# Altium PCB zigbee_board.PCBDOC (part 2 of 2)
Units mil, origin at the board's own origin, x right, y up, seen from the top; angles counter-clockwise.
Board outline 1555 x 795 mil, 2 copper layers (TOP, BOTTOM), stack 10.4 mil thick; 37 components, 38 nets, 180 pads, 75 vias.
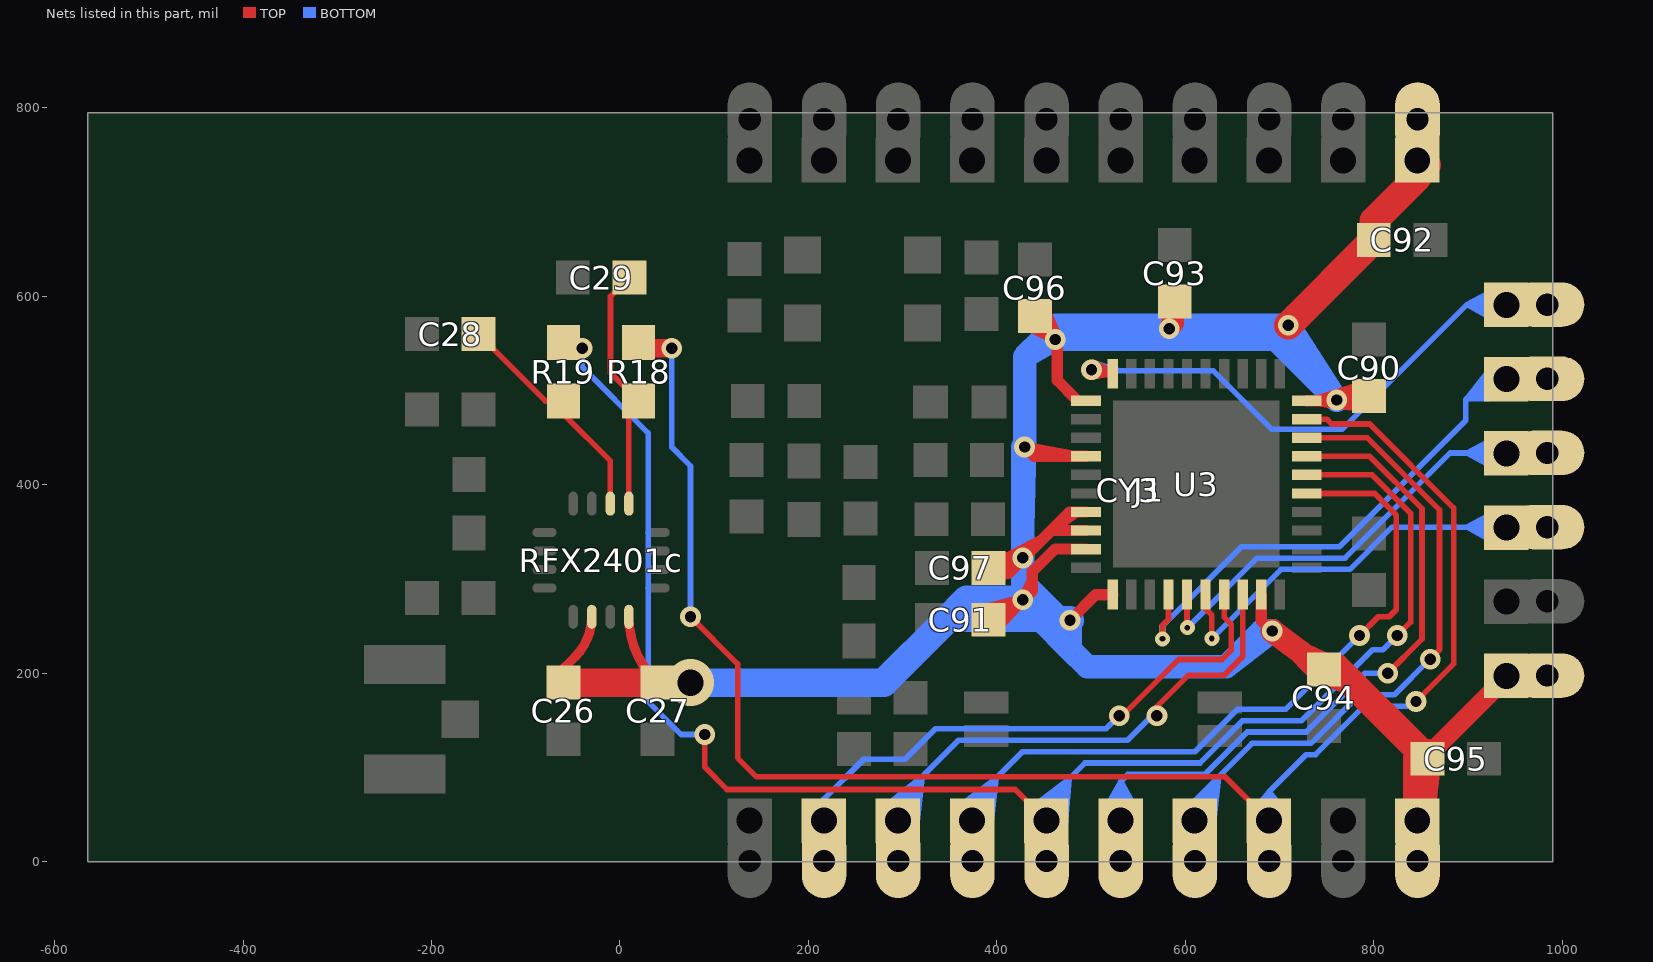
[diagram p2: the nets of this part, all layers, seen from the top]

## Via types
v1: diameter 22, hole 12, TOP to BOTTOM, 67 vias
v2: diameter 25.98, hole 12.99, TOP to BOTTOM, tented top, 4 vias
v3: diameter 16, hole 6, TOP to BOTTOM, 3 vias
v4: diameter 50, hole 28, TOP to BOTTOM, 1 vias

## Nets (pads, with @x,y where several pads share a name; then routed paths per layer and width w, separated by ;. In a path a pad name is that pad's centre, name@x,y a point inside that pad or via, vN(x,y) a via of type N, cw(c..) or ccw(c..) an arc to the next point about the centre after c; other vN are vias at no path point) (continued)
P11: CY3.7 J1.7 R18.1 U3.9 | length 2563.8
  TOP w6: R18.1@20,551 R18.1@26,545 ; v1(75,260) 125,210 125,110 145,90 642.53,90 CY3.7@688.87,43.66 ; U3.9@728.91,469.59 750.41,469.59 755.48,464.52 795.85,464.52 885,375.38 885,210 v1(845,170)
  TOP w20: R18.1@26,545 v1(55,545)
  BOTTOM w6: v1(55,545) 55,440 75,420 v1(75,260) ; CY3.7@668.93,38.42 J1.7@689.13,2.03 ; CY3.7@669.15,21.59 CY3.7@689.13,58.1 ; CY3.7@669.52,50.77 689.13,74.25 ; CY3.7@674.49,41 J1.7@689.13,2.03 ; CY3.7@674.71,47.27 689.13,74.25 ; J1.7@674.74,19.05 CY3.7@689.13,58.1 ; CY3.7@680.3,42.71 J1.7@689.13,2.03 ; CY3.7@680.35,44.94 689.13,74.25 ; J1.7@680.56,17.37 CY3.7@689.13,58.1 ; J1.7@689.13,0.73 689.13,43.66 689.13,74.25 ; J1.7@689.13,16.48 CY3.7@689.13,58.1 ; CY3.7@697.45,42.82 J1.7@689.13,2.03 ; CY3.7@697.42,44.8 689.13,74.25 ; J1.7@697.71,17.37 CY3.7@689.13,58.1 ; CY3.7@703.1,47.03 689.13,74.25 ; CY3.7@703.28,41.18 J1.7@689.13,2.03 ; J1.7@703.53,19.05 CY3.7@689.13,58.1 ; CY3.7@708.35,50.44 689.13,74.25 ; CY3.7@708.88,38.67 J1.7@689.13,2.03 ; CY3.7@709.11,21.59 CY3.7@689.13,58.1 ; 835.07,165.07 789.89,165.07 738.45,113.62 728.51,113.62 689.13,74.25 ; J1.7@689.13,2.03 CY3.7@688.87,43.66 689.13,74.25
P12: CY3.6 J1.6 U3.8 | length 1634.8
  TOP w6: U3.8@728.91,449.9 793.41,449.9 870,373.31 870,225 v1(860,215) ; U3.8@739.15,449.9 762.66,449.9
  BOTTOM w6: CY3.6@590.19,38.42 J1.6@610.39,2.03 ; CY3.6@590.41,21.59 CY3.6@610.39,58.1 ; CY3.6@595.75,41 J1.6@610.39,2.03 ; J1.6@596,19.05 CY3.6@610.39,58.1 ; CY3.6@598.39,52.36 635.44,90.08 ; CY3.6@601.56,42.71 J1.6@610.39,2.03 ; J1.6@601.82,17.37 CY3.6@610.39,58.1 ; CY3.6@602.92,48.39 635.44,90.08 ; J1.6@610.39,0.73 610.39,43.66 610.39,65.03 670.98,125.62 733.38,125.62 784.94,177.17 822.17,177.17 v1(860,215) ; J1.6@610.39,16.48 CY3.6@610.39,58.1 ; CY3.6@618.01,40.16 635.44,90.08 ; CY3.6@618.71,42.82 J1.6@610.39,2.03 ; J1.6@618.97,17.37 CY3.6@610.39,58.1 ; CY3.6@623.82,38.5 635.44,90.08 ; CY3.6@624.54,41.18 J1.6@610.39,2.03 ; J1.6@624.79,19.05 CY3.6@610.39,58.1 ; CY3.6@629.82,37.51 635.44,90.08 ; CY3.6@630.14,38.67 J1.6@610.39,2.03 ; CY3.6@630.37,21.59 CY3.6@610.39,58.1 ; J1.6@610.39,2.03 CY3.6@610.13,43.66 635.44,90.08
P13: CY3.5 J1.5 U3.7 | length 1648.5
  TOP w6: U3.7@728.91,430.22 795.87,430.22 851.31,374.78 851.31,246.31 ; U3.7@739.15,430.22 762.66,430.22 ; v1(815,200) 851.31,236.31 851.31,246.31 ; 850.98,245.98 851.31,246.31
  BOTTOM w6: CY3.5@511.45,38.42 J1.5@531.65,2.03 ; CY3.5@511.45,48.89 531.65,85.26 ; CY3.5@511.67,21.59 CY3.5@531.65,58.1 ; CY3.5@517.01,41 J1.5@531.65,2.03 ; CY3.5@517.01,46.32 531.65,85.26 ; J1.5@517.26,19.05 CY3.5@531.65,58.1 ; CY3.5@522.82,42.71 J1.5@531.65,2.03 ; CY3.5@522.82,44.6 531.65,85.26 ; J1.5@523.08,17.37 CY3.5@531.65,58.1 ; J1.5@531.65,0.73 531.65,43.66 531.65,85.26 ; J1.5@531.65,16.48 CY3.5@531.65,58.1 ; CY3.5@539.97,42.82 J1.5@531.65,2.03 ; CY3.5@539.97,44.5 531.65,85.26 ; J1.5@540.23,17.37 CY3.5@531.65,58.1 ; CY3.5@545.8,41.18 J1.5@531.65,2.03 ; CY3.5@545.8,46.13 531.65,85.26 ; J1.5@546.05,19.05 CY3.5@531.65,58.1 ; CY3.5@551.4,38.67 J1.5@531.65,2.03 ; CY3.5@551.4,48.64 531.65,85.26 ; CY3.5@551.63,21.59 CY3.5@531.65,58.1 ; v1(815,200) 790.78,200 728.4,137.62 665.83,137.62 620.86,92.66 539.05,92.66 531.65,85.26 ; J1.5@531.65,2.03 CY3.5@531.39,43.66 531.65,85.26
P14_CSN: CY3.4 J1.4 R19.1 U3.6 | length 2639.3
  TOP w6: R19.1@-60,551 R19.1@-54,545 ; v1(90,135) 90,100.34 113.68,76.66 419.65,76.66 CY3.4@452.65,43.66 ; U3.6@728.91,410.53 798.57,410.53 839.31,369.79 839.31,254.31 v1(825,240) ; U3.6@739.15,410.53 762.66,410.53
  BOTTOM w6: v1(-40,545) -40,525 30,455 30,170 65,135 v1(90,135) ; CY3.4@432.71,38.42 J1.4@452.91,2.03 ; CY3.4@432.93,21.59 CY3.4@452.91,58.1 ; CY3.4@436.95,57.02 476.88,88.04 ; CY3.4@438.27,41 J1.4@452.91,2.03 ; J1.4@438.52,19.05 CY3.4@452.91,58.1 ; CY3.4@440.97,52.44 476.88,88.04 ; CY3.4@444.08,42.71 J1.4@452.91,2.03 ; J1.4@444.34,17.37 CY3.4@452.91,58.1 ; CY3.4@445.46,48.42 476.88,88.04 ; J1.4@452.91,0.73 452.91,43.66 452.91,64.08 493.56,104.73 615.84,104.73 660.73,149.62 723.43,149.62 798.81,225 810,225 v1(825,240) ; J1.4@452.91,16.48 CY3.4@452.91,58.1 ; CY3.4@460.55,40.19 476.88,88.04 ; CY3.4@461.23,42.82 J1.4@452.91,2.03 ; J1.4@461.49,17.37 CY3.4@452.91,58.1 ; CY3.4@466.37,38.58 476.88,88.04 ; CY3.4@467.06,41.18 J1.4@452.91,2.03 ; J1.4@467.31,19.05 CY3.4@452.91,58.1 ; CY3.4@472.39,37.68 476.88,88.04 ; CY3.4@472.66,38.67 J1.4@452.91,2.03 ; CY3.4@472.89,21.59 CY3.4@452.91,58.1 ; J1.4@452.91,2.03 CY3.4@452.65,43.66 476.88,88.04
P15_SCK: CY3.3 J1.3 U3.5 | length 1770
  TOP w6: U3.5@728.91,390.85 801.28,390.85 824.1,368.03 824.1,267.45 816.66,260 805,260 v1(785,240) ; U3.5@739.15,390.85 762.66,390.85
  BOTTOM w6: CY3.3@353.97,38.42 J1.3@374.17,2.03 ; CY3.3@354.19,21.59 CY3.3@374.17,58.1 ; CY3.3@358.31,57.14 399.18,88.66 ; CY3.3@359.53,41 J1.3@374.17,2.03 ; J1.3@359.78,19.05 CY3.3@374.17,58.1 ; CY3.3@362.31,52.55 399.18,88.66 ; CY3.3@365.34,42.71 J1.3@374.17,2.03 ; J1.3@365.6,17.37 CY3.3@374.17,58.1 ; CY3.3@366.77,48.49 399.18,88.66 ; J1.3@374.17,0.73 374.17,43.66 374.17,63.65 427.27,116.75 610.41,116.75 655.28,161.62 706.62,161.62 v1(785,240) ; J1.3@374.17,16.48 CY3.3@374.17,58.1 ; CY3.3@381.76,40.08 399.18,88.66 ; CY3.3@382.49,42.82 J1.3@374.17,2.03 ; J1.3@382.75,17.37 CY3.3@374.17,58.1 ; CY3.3@387.55,38.38 399.18,88.66 ; CY3.3@388.32,41.18 J1.3@374.17,2.03 ; J1.3@388.57,19.05 CY3.3@374.17,58.1 ; CY3.3@393.55,37.36 399.18,88.66 ; CY3.3@393.92,38.67 J1.3@374.17,2.03 ; CY3.3@394.15,21.59 CY3.3@374.17,58.1 ; J1.3@374.17,2.03 CY3.3@373.91,43.66 399.18,88.66
P16_MOSI: CY3.2 J1.2 U3.38 | length 1538.8
  TOP w6: v1@564.33,158.82 603.53,198.02 641.52,198.02 661,217.5 U3.38@661,283.56 ; 661,249.82 U3.38@661,273.33
  BOTTOM w6: CY3.2@275.23,38.42 J1.2@295.43,2.03 ; CY3.2@275.45,21.59 CY3.2@295.43,58.1 ; CY3.2@279.38,56.91 320.7,90.1 ; CY3.2@280.79,41 J1.2@295.43,2.03 ; J1.2@281.04,19.05 CY3.2@295.43,58.1 ; CY3.2@283.45,52.4 320.7,90.1 ; CY3.2@286.6,42.71 J1.2@295.43,2.03 ; J1.2@286.86,17.37 CY3.2@295.43,58.1 ; CY3.2@287.98,48.41 320.7,90.1 ; J1.2@295.43,0.73 295.43,43.66 295.43,64.84 359.44,128.84 538.84,128.84 v1@567.5,157.5 ; J1.2@295.43,16.48 CY3.2@295.43,58.1 ; CY3.2@303.04,40.13 320.7,90.1 ; CY3.2@303.75,42.82 J1.2@295.43,2.03 ; J1.2@304.01,17.37 CY3.2@295.43,58.1 ; CY3.2@308.84,38.45 320.7,90.1 ; CY3.2@309.58,41.18 J1.2@295.43,2.03 ; J1.2@309.83,19.05 CY3.2@295.43,58.1 ; CY3.2@314.83,37.43 320.7,90.1 ; CY3.2@315.18,38.67 J1.2@295.43,2.03 ; CY3.2@315.41,21.59 CY3.2@295.43,58.1 ; J1.2@295.43,2.03 CY3.2@295.17,43.66 320.7,90.1
  other v1: 570,155
P17_MISO: CY3.1 J1.1 U3.37 | length 1220.3
  TOP w6: v1(530,155) 538.24,159.82 593.09,214.66 639.15,214.66 649,224.51 649,251.9 641.32,259.58 ; U3.37@641.32,273.33 641.32,259.58 ; U3.37@641.32,283.56 641.32,259.58
  BOTTOM w6: CY3.1@196.49,38.42 J1.1@216.69,2.03 ; CY3.1@196.71,21.59 CY3.1@216.69,58.1 ; CY3.1@202.05,41 J1.1@216.69,2.03 ; J1.1@202.3,19.05 CY3.1@216.69,58.1 ; CY3.1@207.86,42.71 J1.1@216.69,2.03 ; J1.1@208.12,17.37 CY3.1@216.69,58.1 ; CY3.1@216.43,43.66 J1.1@216.69,2.03 ; J1.1@216.69,0.73 CY3.1@216.69,43.66 ; J1.1@216.69,16.48 CY3.1@216.69,58.1 ; CY3.1@216.69,45 216.69,66.69 258.77,108.77 302.64,108.77 335,141.14 516.14,141.14 v1(530,155) ; CY3.1@225.01,42.82 J1.1@216.69,2.03 ; J1.1@225.27,17.37 CY3.1@216.69,58.1 ; CY3.1@230.84,41.18 J1.1@216.69,2.03 ; J1.1@231.09,19.05 CY3.1@216.69,58.1 ; CY3.1@236.44,38.67 J1.1@216.69,2.03 ; CY3.1@236.67,21.59 CY3.1@216.69,58.1
P20: CY3.12 J1.12 U3.36 | length 1513
  TOP w6: U3.36@620,270 628.37,261.63 v3(628.37,236.84) ; U3.36@621.63,283.56 U3.36@624.14,283.56
  BOTTOM w6: v3(628.37,236.84) 701.77,310.24 774.8,310.24 819.62,355.06 940.84,355.06 J1.12@984.41,355.06 ; CY3.12@935.55,334.75 899.22,355.06 ; CY3.12@935.92,374.7 899.22,355.06 ; CY3.12@938.14,340.31 899.22,355.06 ; CY3.12@938.41,369.1 899.22,355.06 ; CY3.12@939.87,346.11 899.22,355.06 ; CY3.12@940.03,363.26 899.22,355.06 ; CY3.12@941.66,363.26 J1.12@982.46,355.06 ; CY3.12@941.81,346.11 J1.12@982.46,355.06 ; CY3.12@942.06,363.21 J1.12@968.66,355.06 ; CY3.12@942.29,346.18 J1.12@968.66,355.06 ; CY3.12@943.28,369.1 J1.12@982.46,355.06 ; CY3.12@943.54,340.31 J1.12@982.46,355.06 ; CY3.12@944.49,368.84 J1.12@968.66,355.06 ; CY3.12@944.88,340.63 J1.12@968.66,355.06 ; CY3.12@945.77,374.7 J1.12@982.46,355.06 ; CY3.12@946.13,334.75 J1.12@982.46,355.06 ; CY3.12@948.22,373.94 J1.12@968.66,355.06 ; CY3.12@948.75,335.63 J1.12@968.66,355.06 ; CY3.12@963.55,335.08 CY3.12@927.04,355.06 ; CY3.12@963.55,375.04 CY3.12@927.04,355.06 ; J1.12@966.09,340.67 CY3.12@927.04,355.06 ; J1.12@966.09,369.46 CY3.12@927.04,355.06 ; J1.12@967.77,346.49 CY3.12@927.04,355.06 ; J1.12@967.77,363.64 CY3.12@927.04,355.06 ; 899.22,355.06 CY3.12@940.84,354.68 ; CY3.12@927.04,355.06 J1.12@968.66,355.06 ; CY3.12@940.84,354.68 J1.12@982.46,355.06 ; CY3.12@940.84,354.68 J1.12@968.66,355.06
P21: CY3.13 J1.13 U3.35 | length 1640.9
  TOP w6: v3@601.95,249.82 601.95,273.33 v3(602.35,248.35) ; U3.35@601.95,277.35 v3(602.35,248.35) ; U3.35@601.95,283.56 601.95,248.35 v3(602.35,248.35)
  BOTTOM w6: v3(602.35,248.35) 676.25,322.24 769.74,322.24 881.3,433.8 940.84,433.8 J1.13@984.41,433.8 ; CY3.13@935.55,413.49 899.22,433.8 ; CY3.13@935.92,453.44 899.22,433.8 ; CY3.13@938.14,419.05 899.22,433.8 ; CY3.13@938.41,447.84 899.22,433.8 ; CY3.13@939.87,424.85 899.22,433.8 ; CY3.13@940.03,442 899.22,433.8 ; CY3.13@941.66,442 J1.13@982.46,433.8 ; CY3.13@941.81,424.85 J1.13@982.46,433.8 ; CY3.13@942.06,441.95 J1.13@968.66,433.8 ; CY3.13@942.29,424.92 J1.13@968.66,433.8 ; CY3.13@943.28,447.84 J1.13@982.46,433.8 ; CY3.13@943.54,419.05 J1.13@982.46,433.8 ; CY3.13@944.49,447.58 J1.13@968.66,433.8 ; CY3.13@944.88,419.37 J1.13@968.66,433.8 ; CY3.13@945.77,453.44 J1.13@982.46,433.8 ; CY3.13@946.13,413.49 J1.13@982.46,433.8 ; CY3.13@948.22,452.68 J1.13@968.66,433.8 ; CY3.13@948.75,414.37 J1.13@968.66,433.8 ; CY3.13@963.55,413.82 CY3.13@927.04,433.8 ; CY3.13@963.55,453.78 CY3.13@927.04,433.8 ; J1.13@966.09,419.41 CY3.13@927.04,433.8 ; J1.13@966.09,448.2 CY3.13@927.04,433.8 ; J1.13@967.77,425.23 CY3.13@927.04,433.8 ; J1.13@967.77,442.38 CY3.13@927.04,433.8 ; 899.22,433.8 CY3.13@940.84,433.42 ; CY3.13@927.04,433.8 J1.13@968.66,433.8 ; CY3.13@940.84,433.42 J1.13@982.46,433.8 ; CY3.13@940.84,433.42 J1.13@968.66,433.8
P22: CY3.14 J1.14 U3.34 | length 1703.6
  TOP w6: v3(575.99,236.49) 575.99,250.99 582.26,257.26 U3.34@582.26,283.56
  BOTTOM w6: v3(575.99,236.49) 575.99,250.28 659.98,334.27 763.71,334.27 897.87,468.43 897.87,490.36 920.05,512.54 940.84,512.54 J1.14@984.41,512.54 ; CY3.14@927.82,528.15 898.35,490.85 ; CY3.14@932.35,524.07 898.35,490.85 ; CY3.14@936.29,519.48 898.35,490.85 ; CY3.14@941.66,520.74 J1.14@982.46,512.54 ; CY3.14@941.81,503.59 J1.14@982.46,512.54 ; CY3.14@942.06,520.69 J1.14@968.66,512.54 ; CY3.14@942.29,503.66 J1.14@968.66,512.54 ; CY3.14@943.28,526.58 J1.14@982.46,512.54 ; CY3.14@943.54,497.79 J1.14@982.46,512.54 ; CY3.14@943.99,504.13 898.35,490.85 ; CY3.14@944.49,526.32 J1.14@968.66,512.54 ; CY3.14@944.88,498.11 J1.14@968.66,512.54 ; CY3.14@945.31,498.24 898.35,490.85 ; CY3.14@945.77,532.18 J1.14@982.46,512.54 ; CY3.14@945.87,492.16 898.35,490.85 ; CY3.14@946.13,492.23 J1.14@982.46,512.54 ; CY3.14@948.22,531.42 J1.14@968.66,512.54 ; CY3.14@948.75,493.11 J1.14@968.66,512.54 ; CY3.14@963.55,492.56 CY3.14@927.04,512.54 ; CY3.14@963.55,532.52 CY3.14@927.04,512.54 ; J1.14@966.09,498.15 CY3.14@927.04,512.54 ; J1.14@966.09,526.94 CY3.14@927.04,512.54 ; J1.14@967.77,503.97 CY3.14@927.04,512.54 ; J1.14@967.77,521.12 CY3.14@927.04,512.54 ; 898.35,490.85 CY3.14@940.84,512.16 ; CY3.14@927.04,512.54 J1.14@968.66,512.54 ; CY3.14@940.84,512.16 J1.14@982.46,512.54 ; CY3.14@940.84,512.16 J1.14@968.66,512.54
R18_1: C29.1 R18.2 RFX2401c.5 | length 265
  TOP w6: RFX2401c.5@9.53,380.04 9.53,478.53 R18.2@20,489 -10,519 -10,600 C29.1@10,620
R19_1: C28.1 R19.2 RFX2401c.6 | length 249
  TOP w6: C28.1@-150,560 -79,489 R19.2@-60,489 -60,475 -10.16,425.16 RFX2401c.6@-10.16,380.04
RESET: CY3.15 J1.15 U3.20 | length 1908.7
  TOP w6: v1@500.43,514.25 U3.20@523.21,517.82 ; v1@501.53,514.3 U3.20@523.21,520.92 ; v1@502.46,530.03 U3.20@523.21,520.92 ; v1@503.46,529.71 U3.20@523.21,517.82 ; v1@500.58,520.92 v1(500.58,522.25) ; v1@500.58,520.92 U3.20@523.21,520.92 ; v1@500.58,520.92 U3.20@523.21,517.82 ; v1(500.58,522.25) U3.20@523.21,520.92 ; v1(500.58,522.25) U3.20@523.21,517.82 ; U3.20@523.21,517.82 U3.20@523.21,520.92
  BOTTOM w6: v1@501.32,514.28 529.65,520.92 ; v1@502.04,530.11 529.65,520.92 ; CY3.15@935.55,570.97 899.22,591.28 ; CY3.15@935.92,610.93 899.22,591.28 ; CY3.15@938.14,576.53 899.22,591.28 ; CY3.15@938.41,605.32 899.22,591.28 ; CY3.15@939.87,582.33 899.22,591.28 ; CY3.15@940.03,599.48 899.22,591.28 ; CY3.15@941.66,599.48 J1.15@982.46,591.28 ; CY3.15@941.81,582.33 J1.15@982.46,591.28 ; CY3.15@942.06,599.44 J1.15@968.66,591.28 ; CY3.15@942.29,582.4 J1.15@968.66,591.28 ; CY3.15@943.28,605.32 J1.15@982.46,591.28 ; CY3.15@943.54,576.53 J1.15@982.46,591.28 ; CY3.15@944.49,605.06 J1.15@968.66,591.28 ; CY3.15@944.88,576.85 J1.15@968.66,591.28 ; CY3.15@945.77,610.93 J1.15@982.46,591.28 ; CY3.15@946.13,570.97 J1.15@982.46,591.28 ; CY3.15@948.22,610.16 J1.15@968.66,591.28 ; CY3.15@948.75,571.85 J1.15@968.66,591.28 ; CY3.15@963.55,571.3 CY3.15@927.04,591.28 ; CY3.15@963.55,611.26 CY3.15@927.04,591.28 ; J1.15@966.09,576.89 CY3.15@927.04,591.28 ; J1.15@966.09,605.68 CY3.15@927.04,591.28 ; J1.15@967.77,582.71 CY3.15@927.04,591.28 ; J1.15@967.77,599.86 CY3.15@927.04,591.28 ; J1.15@984.41,591.28 940.84,591.28 899.04,591.28 766.85,459.09 691.8,459.09 629.98,520.92 500.58,520.92 v1(500.58,522.25) 529.65,520.92 ; 899.22,591.28 CY3.15@940.84,590.9 ; CY3.15@927.04,591.28 J1.15@968.66,591.28 ; CY3.15@940.84,590.9 J1.15@968.66,591.28 ; CY3.15@940.84,590.9 J1.15@982.46,591.28
VDD_3.3V: C26.2 C27.2 C90.2 C91.2 C92.2 C93.2 C94.2 C95.2 C96.2 C97.2 CY3.9 CY3.10 CY3.16 J1.9 J1.10 J1.16 RFX2401c.14 RFX2401c.16 U3.10 U3.21 U3.24 U3.27 U3.28 U3.29 U3.31 U3.39 | length 7895
  TOP w10: C26.2@-65,200 -47.38,217.62 ccw(c-89.72,259.96) RFX2401c.14@-29.84,259.96 ; RFX2401c.16@9.53,259.96 ccw(c104.86,259.96) 37.45,192.55 C27.2@40,190
  TOP w12: C97.2@386.83,322.94 v1(427.7,322.45) ; 437.82,298.49 v1(427.57,278.17) ; v1(477.82,256.18) 505.07,283.43 ; U3.24@479.16,430.22 v1(429.57,440.19) ; U3.24@483.9,430.22 v1(429.57,440.19) ; U3.28@484.43,351.48 457.79,351.48 ; U3.24@484.43,430.22 442.91,430.22 v1(429.57,440.19) ; U3.21@485,490 464.34,510.66 v1@464.34,555.34 ; U3.29@494.66,331.79 461.79,331.79 437.82,307.82 437.82,287.25 428.16,277.58 v1(427.57,278.17) ; U3.28@494.66,351.48 457.79,351.48 ; U3.27@494.66,371.16 477.47,371.16 ; U3.24@494.66,430.22 439.55,430.22 v1(429.57,440.19) ; U3.39@680.69,283.56 680.69,255.82 732.7,203.8 C94.2@747.36,203.8 v1@697.04,239.46 ; 727.27,207.62 v1(692.31,244.9) ; 728.32,208.18 v1(692.31,244.9) ; C94.2@732.01,214.68 v1(692.31,244.9) ; 735.61,222.16 v1(692.31,244.9) ; C94.2@739.5,194.73 v1@697.04,239.46 ; C94.2@753.31,214.22 v1@697.04,239.46 ; C91.2@391.37,256.83 C91.2@391.37,264.2 ; C91.2@391.37,256.83 v1(427.57,278.17) ; C91.2@391.37,256.83 v1(427.57,278.17) ; C91.2@391.37,264.2 v1(427.57,278.17) ; C91.2@391.37,264.2 v1(427.57,278.17) ; C97.2@391.37,311.83 391.37,306.12 412.43,306.12 ; C97.2@391.37,311.83 447.58,341.27 ; C97.2@391.37,311.83 412.43,306.12 ; C97.2@391.37,311.83 412.43,306.12 ; C97.2@391.37,311.83 v1(427.7,322.45) ; 412.43,306.12 457.79,351.48 ; 412.43,306.12 397.58,322.1 412.43,306.12 ; 412.43,306.12 391.54,299.83 412.43,306.12 ; 412.43,306.12 v1(427.7,322.45) ; v1(427.57,278.17) 386.82,267.93 v1(427.57,278.17) ; v1(427.57,278.17) 398.88,247.47 v1(427.57,278.17) ; v1(427.7,322.45) 447.58,341.27 ; v1(427.7,322.45) 397.92,301.78 447.58,341.27 ; v1(427.7,322.45) 447.58,341.27 ; v1(427.7,322.45) 447.58,341.27 ; v1(427.7,322.45) 457.79,351.48 ; 457.79,351.48 477.47,371.16 ; 457.79,351.48 U3.27@484.43,371.16 ; v1(462.01,554.34) 433.69,569.29 v1@464.34,555.34 ; v1(462.01,554.34) C96.2@440.53,579.15 v1@464.34,555.34 ; v1(462.01,554.34) 450.39,585.99 v1@464.34,555.34 ; 477.47,371.16 U3.27@484.43,371.16 ; 477.47,371.16 U3.27@484.43,371.16 ; 505.07,283.43 523.34,283.43 U3.31@523.21,283.56 505.07,283.43 ; U3.10@739.97,489.27 C90.2@795.09,482.14 ; U3.10@739.97,489.27 793,505.91 v1(760.76,490.02) ; U3.10@739.97,489.27 C90.2@795.34,494.14 ; U3.10@739.97,489.27 v1(760.76,490.02) ; U3.10@739.97,489.27 v1(760.76,490.02) ; U3.10@739.97,489.27 v1(760.76,490.02) ; U3.10@740.99,489.27 C90.2@795.09,482.14 ; U3.10@740.99,489.27 792.96,505.9 v1(760.76,490.02) ; U3.10@740.99,489.27 C90.2@795.34,494.14 ; U3.10@740.99,489.27 v1(760.76,490.02) ; U3.10@740.99,489.27 v1(760.76,490.02) ; U3.10@740.99,489.27 v1(760.76,490.02) ; v1(760.76,490.02) 780.66,489.27 739.15,489.27 v1(760.76,490.02) ; v1(760.76,490.02) C90.2@795.34,489.27 ; v1(760.76,490.02) U3.10@728.91,489.27 C90.2@795.34,489.27 ; v1(760.76,490.02) C90.2@795.09,482.14 ; v1(760.76,490.02) C90.2@795.09,482.14 ; v1(760.76,490.02) C90.2@795.34,494.14 ; v1(760.76,490.02) C90.2@795.34,494.14 ; C90.2@795.34,489.27 C90.2@795.34,494.14
  TOP w20: C95.2@867.5,122.5 CY3.10@940.84,195.84 ; v1(583.14,565.55) v1@588.95,571.35 ; v1(583.14,565.55) C93.2@588.95,594.71 ; v1(583.14,565.55) C93.2@588.95,594.71 ; v1(583.14,565.55) C93.2@588.95,594.71 ; v1(583.14,565.55) C93.2@588.95,594.71 ; v1@588.95,571.35 C93.2@588.95,594.71 ; v1@588.95,571.35 C93.2@588.95,594.71 ; v1@588.95,571.35 C93.2@588.95,594.71
  TOP w25: v1(692.31,244.9) C94.2@747.36,203.8 v1(692.31,244.9)
  TOP w30: C26.2@-60,190 C27.2@40,190 ; 718.57,578.46 C92.2@800.21,660.1 ; C92.2@784.15,644.04 v1(709.51,569.4) C92.2@800.21,660.1 ; CY3.16@846.35,744.44 846.35,726.35 800.21,680.21 C92.2@800.21,660.1 ; C95.2@857.07,114.96 C95.2@857.07,109.26 ; CY3.10@940.84,195.84 CY3.10@940.84,197.2 ; CY3.9@846.35,43.66 C95.2@846.35,109.26 ; CY3.9@846.35,43.66 C95.2@857.07,109.26 ; CY3.9@846.35,43.66 C95.2@846.35,109.26 ; CY3.9@846.35,43.66 C95.2@857.07,109.26 ; C95.2@846.35,109.26 C95.2@857.07,109.26 ; C95.2@846.35,109.26 846.61,16.48 C95.2@857.07,109.26 ; C95.2@857.07,109.26 759.68,206.65 747.36,206.65 C94.2@747.36,203.8 775.43,190.9 C95.2@857.07,109.26 ; CY3.10@940.84,197.2 968.66,197.58 CY3.10@940.84,197.2 ; J1.16@846.61,772.38 856.35,739.44 J1.16@846.61,772.38
  BOTTOM w25: 343.3,253.3 346.18,256.18 446.95,256.18 ; 427.62,296.93 427.7,296.86 ; v1(427.7,322.45) v1(427.57,278.17) ; 427.7,354.06 v1(429.57,440.19) ; v1(427.57,278.17) 427.57,275.56 v1@427.7,275.43 ; v1(427.57,278.17) 477.82,225.3 ; v1@427.7,275.43 427.7,278.04 427.7,296.86 ; v1@427.7,275.43 446.95,256.18 ; 427.7,296.86 v1@468.38,256.18 ; 427.7,296.86 427.7,440.19 v1(429.57,440.19) ; v1(429.57,440.19) 429.57,536.14 ; 429.57,536.14 447.78,554.34 ; 429.57,536.14 v1(462.01,554.34) 447.78,554.34 ; 446.95,256.18 477.82,225.3 ; 446.95,256.18 449.56,256.18 v1@468.38,256.18 ; 447.78,554.34 571.94,554.34 ; 447.78,554.34 462.84,569.4 v1(709.51,569.4) ; v1@468.38,256.18 v1(477.82,256.18) ; 477.82,225.3 496.25,206.88 643.42,206.88 ; 477.82,225.3 v1(477.82,256.18) ; 477.82,225.3 v1(477.82,256.18) ; 477.82,225.3 v1(477.82,256.18) ; 571.94,554.34 v1(583.14,565.55) ; 571.94,554.34 696.44,554.34 ; 571.94,554.34 v1(583.14,565.55) ; 571.94,554.34 v1(583.14,565.55) ; 643.42,206.88 681.44,244.9 v1(692.31,244.9) 643.42,206.88 ; 696.44,554.34 v1(709.51,569.4) ; 696.44,554.34 v1(760.76,490.02) ; 696.44,554.34 v1(709.51,569.4) ; 696.44,554.34 v1(709.51,569.4) ; v1(709.51,569.4) v1(760.76,490.02) ; v1(709.51,569.4) v1(760.76,490.02) ; v1(709.51,569.4) 696.72,554.05 v1(760.76,490.02)
  BOTTOM w30: v4(75,190) 280,190 346.18,256.18 368.17,278.17 v1(427.57,278.17) 427.7,278.04 449.56,256.18 468.38,256.18 v1(477.82,256.18)
pads on no net: CY1.3 CY1.4 CY2.3 CY2.4 RFX2401c.13 U3.41

## Polygon pours and split planes (outlines as drawn)
GND on TOP "TopLayer-No Net" (solid, remove dead copper, pour order 1001): -235,725 -170,790 182.17,790 183.27,788.9 186.81,785.36 186.81,714.82 -245.18,714.82
GND on TOP "TopLayer-No Net" (solid, remove dead copper, pour order 1000): 20,5 -285,5 -285,675 -240,720 -235,725 110,725 110,35 80,5
GND on TOP "TOP-GND" (solid, remove dead copper, pour order 1000): 0.16,597.38 107.57,673.86 107.57,788.67 984.41,791.32 984.41,3.92 0.16,3.92
GND on BOTTOM "TopLayer-No Net" (solid, remove dead copper, pour order 1002): 50,0 -280,0 -285,5 -285,680 -175,790 -170,790 165.81,790 167.83,787.98 167.83,2.41
GND on BOTTOM "BOTTOM-GND" (solid, remove dead copper, pour order 1001): 103.93,676.92 103.93,787.83 985.92,789.81 985.92,2.41 1.67,2.41 1.67,604.28

## Keep-outs
Keep-Out Layer:
  lines w6: -460,789.42 ccw(c-458.95,689.43) -558.95,690.65 -559.05,101.83 ccw(c-459.06,99.91) -456.62,-0.06 ; 885.59,-0.12 ccw(c883.67,99.86) 983.65,97.94 ; 888.51,789.42 cw(c883.98,689.53) 983.86,694.24

## Other copper
TOP:
  rectangle net GND: -50,290 10,350
  pour cut-out: -150,585 -50,585 -10,625 -6.48,621.48 34,621.48 43.5,611.98 43.5,575.5 59.5,575.5 75,560 75,535 55,515 55,470 10,425 0,425 -60,485 -60,489 -79,489 -150,560
  pour cut-out: 395,545 410,560 410,600 420,610 460,610 475,595 480.84,595 495.84,610 542.89,562.95 542.89,517.82 525.07,500 460,500
  pour cut-out: 885.59,-0.12 870,15.47 870,95 877.95,95 881.07,98.12 881.07,13.36 885.41,9.02
  pour cut-out: 805,70 830,95 835,95 835,70
  pour cut-out: 660,102.5 660,109.08 666.52,115.6 666.52,132.49 654.01,145 630,145 630,105
  pour cut-out: 660,130 659.97,130.03 361.58,130.03 361.58,91.58 360,90 375,75 660,75
  pour cut-out: 670,240 670,216.87 678.44,208.44 721.84,208.44 724.23,210.82 724.23,212.27 697.04,239.46
  pour cut-out: 672.23,73.28 824.94,73.28 824.94,-20.06 820,-25 815,-20 675,-20
  pour cut-out: 660,163.02 666.52,169.54 666.52,196.52 695,225 670.18,249.82 661,249.82 661,224.02 635,198.02
  pour cut-out: 375.42,109.26 381.16,115 660,115 660,163.02 623.02,200 510,200 443.41,133.41 377.05,133.41
  pour cut-out: 375,90 270,90 260,100 273.8,113.8 373.76,113.8 375.56,115.6
  pour cut-out: 260,100 285,125 285,185 323.05,185 375,133.05 375,100
  pour cut-out: 52.38,162.62 -87.62,162.62 -95,170 -95,245 -69.5,270.5 54.5,270.5 55,270
  pour cut-out: 45,170 65,150 65,112.37 100.71,76.66 155,76.66 155,80 125,110 125,210 95,240 95,275 85,285 -55,285 -84,256 -84,169.57
  pour cut-out: 110.21,390.19 95.02,375 125,375
  pour cut-out: 420,385 369.4,385 366.93,387.47 366.93,424.29 365.7,425.52 434.85,425.52 439.55,430.22
  pour cut-out: 260,530 240,510 260,510
  pour cut-out: 425.09,485.55 425.09,470.09 400,445 465.01,445 469.91,449.9
  pour cut-out: 315,515 318.79,511.21 354.19,511.21 365,522.02 365,525.57 315,525.57
  pour cut-out: 257.95,544.75 257.71,545 110,545 95,560 95,600 110,615 165,615
  pour cut-out: 250,510 250,556.52 252.68,559.2 256.88,555 295,555 295,510
  pour cut-out: 281.25,616.86 253.14,616.86 225,645 220,640 220,571.66 256.83,571.66 265.17,580
  pour cut-out: 130,600 135,600 160,625 160,661.6 173.4,675 225,675 231.04,668.96 231.04,571.66 158.34,571.66
  pour cut-out: 785,690 700,690 690,700 749.03,700 762.09,713.06 770.15,705 785,705
  pour cut-out: 519.97,660 524.74,660 550,685.26 516.08,685.26
  pour cut-out: 535,595 560,595 575,610 575,570 570,565 565,565
  pour cut-out: 365,545 347.04,562.96 347.04,597.33 369.71,620 375,620 372.73,622.27 286.66,622.27 245.24,580.84 231.04,580.84 274.32,537.57 365,537.57
  pour cut-out: 290,630 290,655 275,670 275,695 305,695 305,672.68 310,667.68 310,665
  pour cut-out: 65,820 65,790 170,790 192.72,767.28 196.71,767.28 196.71,818.29 195,820
  pour cut-out: 841,690.72 855.72,690.72 885,720 885,795 875,805 845,805
  pour cut-out: 740,701.24 758.76,701.24 790,670 835,715 835,805 740,805
  pour cut-out: 974.77,693.81 974.77,644.77 955,625 1000,625 1000,690 995,695
  pour cut-out: 863.71,413.64 901.36,413.64 910,405 910,384.34 905.33,379.67 905,380 865,380
  pour cut-out: 995,245 981.99,245 963.81,226.82 994.32,226.82 995,227.5
  pour cut-out: 900,255 935,220 900,220
  pour cut-out: 900,300 905,300 940,335 930,345 900,345
  pour cut-out: 995,245 976.82,226.82 963.81,226.82 963.81,211.19 965,210 995,210
  pour cut-out: 960,335 985,310 1005,310 1005,335
  pour cut-out: 980,150 960,170 960,175 980,175
  pour cut-out: 970.46,167.7 970.46,164.54 975,160 974.51,159.51 974.51,98.12 977.63,95 995,95 1015,115 1015,170 972.76,170
  pour cut-out: 885.66,404.66 905,424 905,625 910,630 970,630 990,650 1035,650 1040,645 1040,360 925,360 885.66,399.34
  region: -290.27,88.08 -467.09,88.08 -467.09,142.33 -175.59,142.33 -175.59,162.01 -467.09,162.01 -467.09,229.57 -363.15,229.57 -363.15,348.01 -466.92,348.01 -466.92,415.31 -363.42,415.31 -363.42,533.85 -466.92,533.85 -466.92,600.45 -311.33,600.45 -311.33,620.28 -487.45,620.28 -487.45,514.05 -382.12,514.05 -382.12,435.03 -487.6,435.03 -487.6,328.28 -382.2,328.28 -382.2,249.56 -487.8,249.56 -487.8,52.1 -290.29,52.1 -290.29,66.4 -270.27,66.4 -270.17,75.98 -290.27,75.98
  region net GND: -244.13,43.46 -160.93,43.46 -154.62,49.78 -154.62,106.61 -161.68,113.68 -268.79,113.68 -273.32,109.14 -273.32,49.48 -267.75,43.9 -244.13,43.9
  pour cut-out: 160,90 170,80 170,70 195,45 195,90
  pour cut-out: 195,25 170,0 195,0
  pour cut-out: -180,590 -190,580 -190,520 -174,504 -139,504 -135,500 -135,365 -99.84,329.84 -85.82,329.84 -53.79,361.88 52.39,361.88 55.51,365 55,365.51 55,565 45,565 20,590
  pour cut-out: -190,520 -190,190 -210,170 -215,170 -215,150 -147.48,150 -120,177.48 -120,520
  pour cut-out: -120,285 -90,315 -90,340 -125,340 -130,335 -130,285
  pour cut-out: -190,175 -265,175 -290,200 -290,165 -190,165
  pour cut-out: 75,365 75,375 45,405 45,365
  pour cut-out: -295,110 -260,145 -295,145
  pour cut-out: -133.74,163.74 -133.74,121.26 -140,115 -195,115 -215,135 -215,160
  pour cut-out: -260,0 -295,35 -315,35 -315,0
  pour cut-out: -295,110 -263.75,78.75 -263.75,68.3 -287.05,45 -295,45
  pour cut-out: 400,645 435,680 435,684.69 400,684.69
  pour cut-out: 284.56,229 284.56,255.44 270,270 230,270 220,260 220,215 230,205 317.26,205 330.3,218.04 305,218.04
  pour cut-out: 285,175 285,185 260,210 278.01,228.01 375,228.01 360,213.01 360,200 373.35,186.65 376.61,186.65 376.61,178.46 375.7,177.55
  pour cut-out: 421.99,238.01 487.89,238.01 511.69,261.82 521.35,261.82 533.62,249.54 535,250.92 535,295 455,295
  pour cut-out: 418.49,186.65 438.35,186.65 450,175 449.46,174.46 412.11,174.46
  pour cut-out: 59.5,575.5 40,595 30,595 30,580 45,565
  pour cut-out: -20,615 -20,645 -10,655 35,655 40,650 40,603.5 43.5,600
  pour cut-out: 680.69,610 730,610 730,570 720,560 680.69,560
  pour cut-out: 770,524.24 745,549.24 745,595 692.89,595 661,563.11 661,517.82
  pour cut-out: 785,625 825,625 840,640 840,675 872.27,707.27 812.27,707.27 805,700
  pour cut-out: -272.15,59.9 -272.15,7.85 -275,5 -310,5 -315,10 -305,20 -305,60
  pour cut-out: -273.32,79.31 -273.32,121.68 -250,145 -318.67,145 -321.34,142.33
  pour cut-out: 21.88,345.27 21.88,353.79 9.53,366.14 9.53,380.04 14.96,380.04 30,365
  pour cut-out: -100,310 -65,310 -55,320 -55,334.53 -70.47,350 -90,350
  pour cut-out: 760,170 730,170 685,215 685,220 741.21,220 741.85,219.37
  pour cut-out: 745,170 780,170 780,186.34 771.6,194.73 739.5,194.73
  pour cut-out: 350,610 405,610 420,625 420,655 437.68,672.68 375,672.68
  pour cut-out: 460,610 495.84,610 490,604.16 490,580 475,580
  pour cut-out: 972.9,235.91 1006.99,270 1010,270 1010,240 1005,235
  pour cut-out: 626.89,640 611.89,625 570,625 560,615 555,615 545,605 540,605 529.15,615.85 529.15,618.71 516.68,618.71 507.97,610 538.66,579.31 626.89,579.31
  pour cut-out: 575,610 519.97,610 554.97,575 560,575
  pour cut-out: 710,600 670,640 670,600.69 680.69,590
  pour cut-out: 845,445 880,445 920,485 950,455 950,405 886.18,405 879.26,398.09
  pour cut-out: 225,700 201.63,700 175,726.63 175,800 180,805 225,805
BOTTOM:
  pour cut-out: 974.77,693.81 974.77,644.77 955,625 910,625 801.08,516.08 743.93,516.08 743.93,496.09 773.89,466.14 895.19,587.43 982.43,587.43 1045,650
  pour cut-out: 888.69,472.23 888.69,526.31 872.7,542.3 850.05,542.3 892.75,585 1020,585 1020,545 1015,540
  pour cut-out: 985.92,303.76 954.04,335.63 1009.37,335.63 1015,330
  pour cut-out: 985.92,252.26 950,216.34 950,215 1010,215 1015,220
  pour cut-out: 740,310.24 711.03,281.27 711.03,242.56 662.44,242.56 640,265 665.15,290.15 665.15,311.15
  pour cut-out: 651.77,170.1 572.23,170.1 570,172.33 562.98,165.31 562.98,144.73 535,116.75 610.41,116.75 635.99,142.33
  pour cut-out: 572.23,170.1 570,172.33 512.33,172.33 481.14,141.14 559.38,141.14 562.98,144.73
  pour cut-out: 760,220 760,250 770,260 840,260 890,210 935,210 935,170 778.55,170 769.67,178.88
  pour cut-out: 974.7,99.07 974.7,145.3 950,170 939.66,159.66 864.38,159.66 879.72,175 1020,175 1020,140 995,115
  pour cut-out: 939.66,159.66 981.57,159.66 985.92,164 969.92,180 945,180 935,170
  pour cut-out: 160,795 175,780 175,720 190,705 875,705 890,720 890,770 895,775 930,775 930,785 870,845 175,845
  pour cut-out: 646.07,100.71 666.78,80 875,80 885,70 885,18.82 893.89,9.93 895.07,9.93 910,-5 895,-20 610,-20
  pour cut-out: 160,-5 180,15 180,70 195,85 255,85 255,-5
  pour cut-out: 58.51,128.51 72.02,115 115,115 120,120 120,150 145,175 145,190 30,190 30,170 39.69,160.31
  pour cut-out: 656.92,493.98 481.02,493.98 480,495 445,460 429.57,460 429.57,536.14 447.78,554.34 655,554.34
  pour cut-out: -46.63,561.01 61.63,561.01 55,554.38 55,297.33 92.33,260 92.33,232.67 130,195 130,190 50,190 40,180 30,180 30,455 -40,525
  pour cut-out: 353.03,293.31 428.02,368.3 428.02,269.19 415,256.18
  pour cut-out: 795,75 785,85 785,120 815,150 815,177.17 750.99,177.17 699.43,125.62 670.98,125.62 650.67,105.31 650.67,75.67 650,75
  pour cut-out: 967.96,234.3 840.7,234.3 840,235 839.7,234.7 839.7,194.7 969.7,194.7 970,195
  pour cut-out: 911.22,325.06 789.61,325.06 819.62,355.06 928.73,355.06 929.01,354.79
  pour cut-out: 567.52,253.79 540,226.27 540,220 595,220

## Silkscreen, mask and mechanical layers (free items; w line width, h text height)
Silkscreen Bottom:
  text "0231T" at 600,425 h50
  text "COSINE.EP.V1.20" at 749.48,357.06 h50
Mechanical 1:
  lines w6: -460,789.42 888.51,789.42 ; -456.62,-0.06 885.53,-0.06 ; 983.86,98.16 983.86,694.24
Layer_16 and Layer_17 and Layer_18 and Layer_19 and Layer_20 and Layer_21 and Layer_22 and Layer_23 and Layer_24 and Layer_25 and Layer_26 and Layer_27 and Layer_28 and Layer_29 and Layer_30 and Layer_31 and Layer_32 and Layer_33 and Layer_34 and Layer_35:
  lines w10: 468.38,256.18 477.82,256.18